# Altium PCB PCB1.PcbDoc
Units mm, origin at the board's own origin, x right, y up, seen from the top; angles counter-clockwise.
Board outline 119 x 80.39 mm, 2 copper layers (Top Layer, Bottom Layer); 30 components, 53 nets, 178 pads, 36 vias.
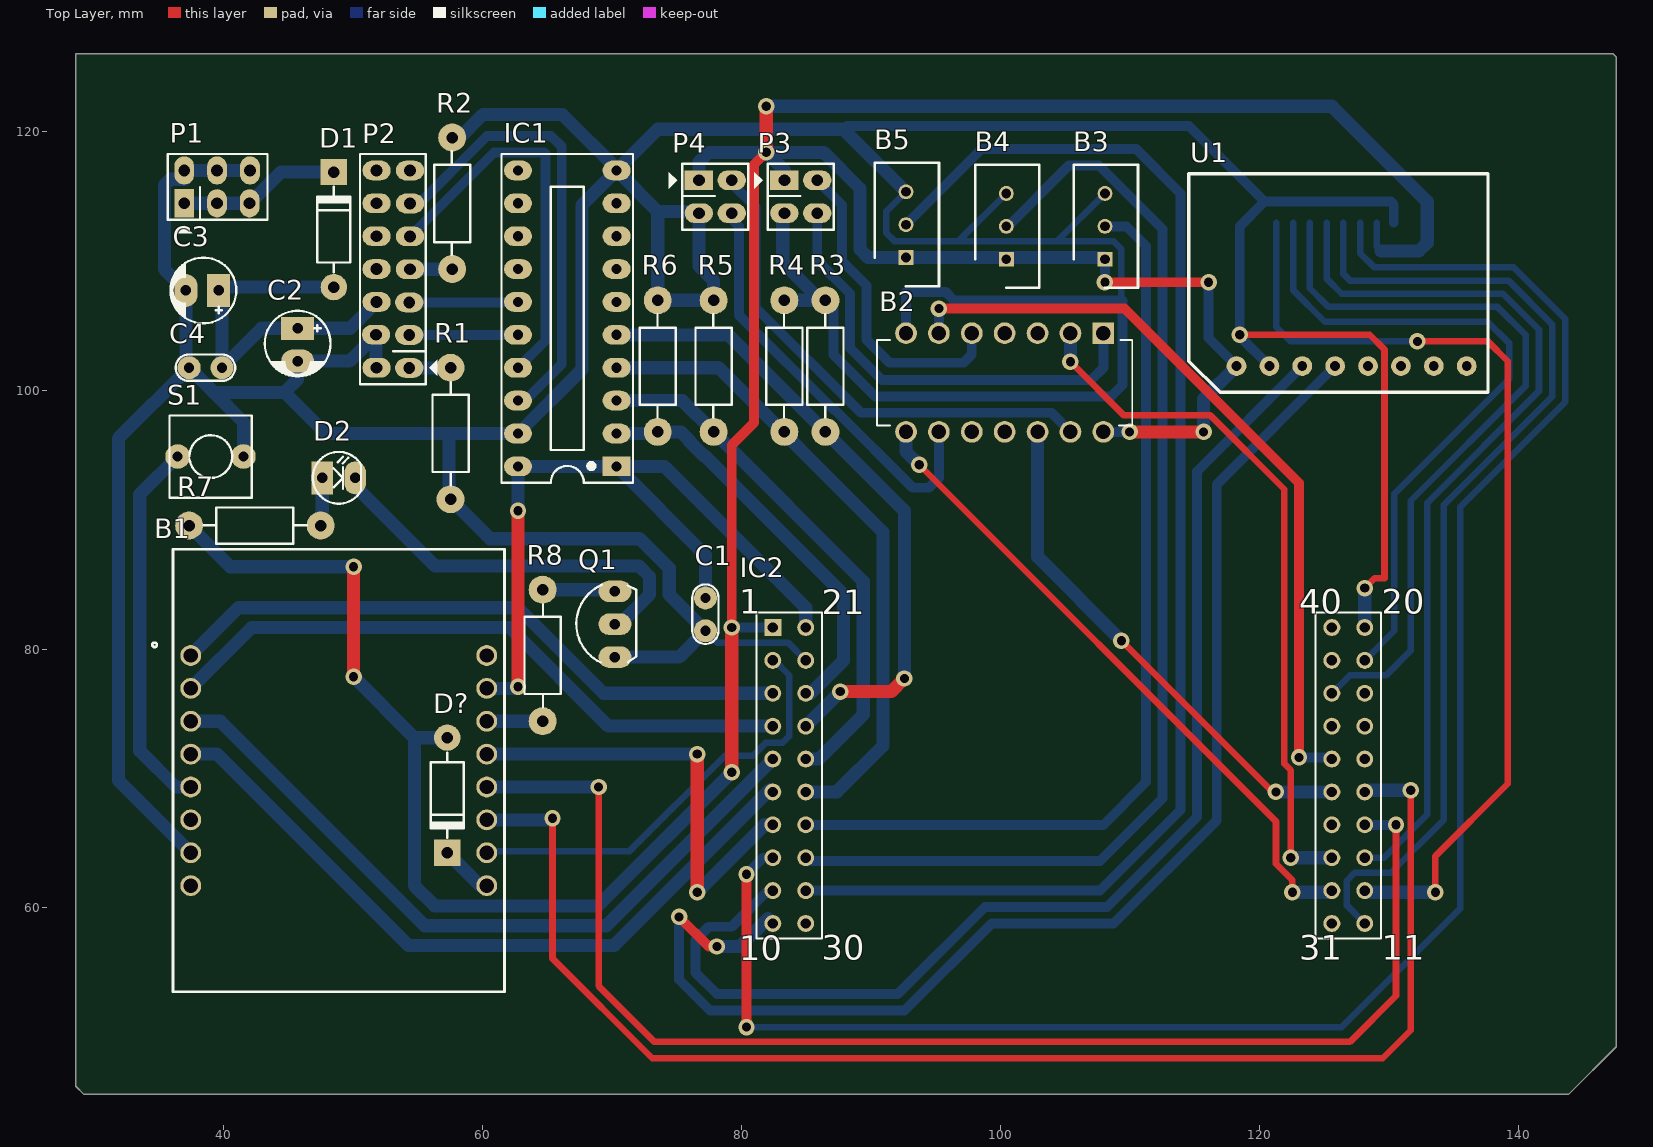
[diagram p0: Top Layer view]
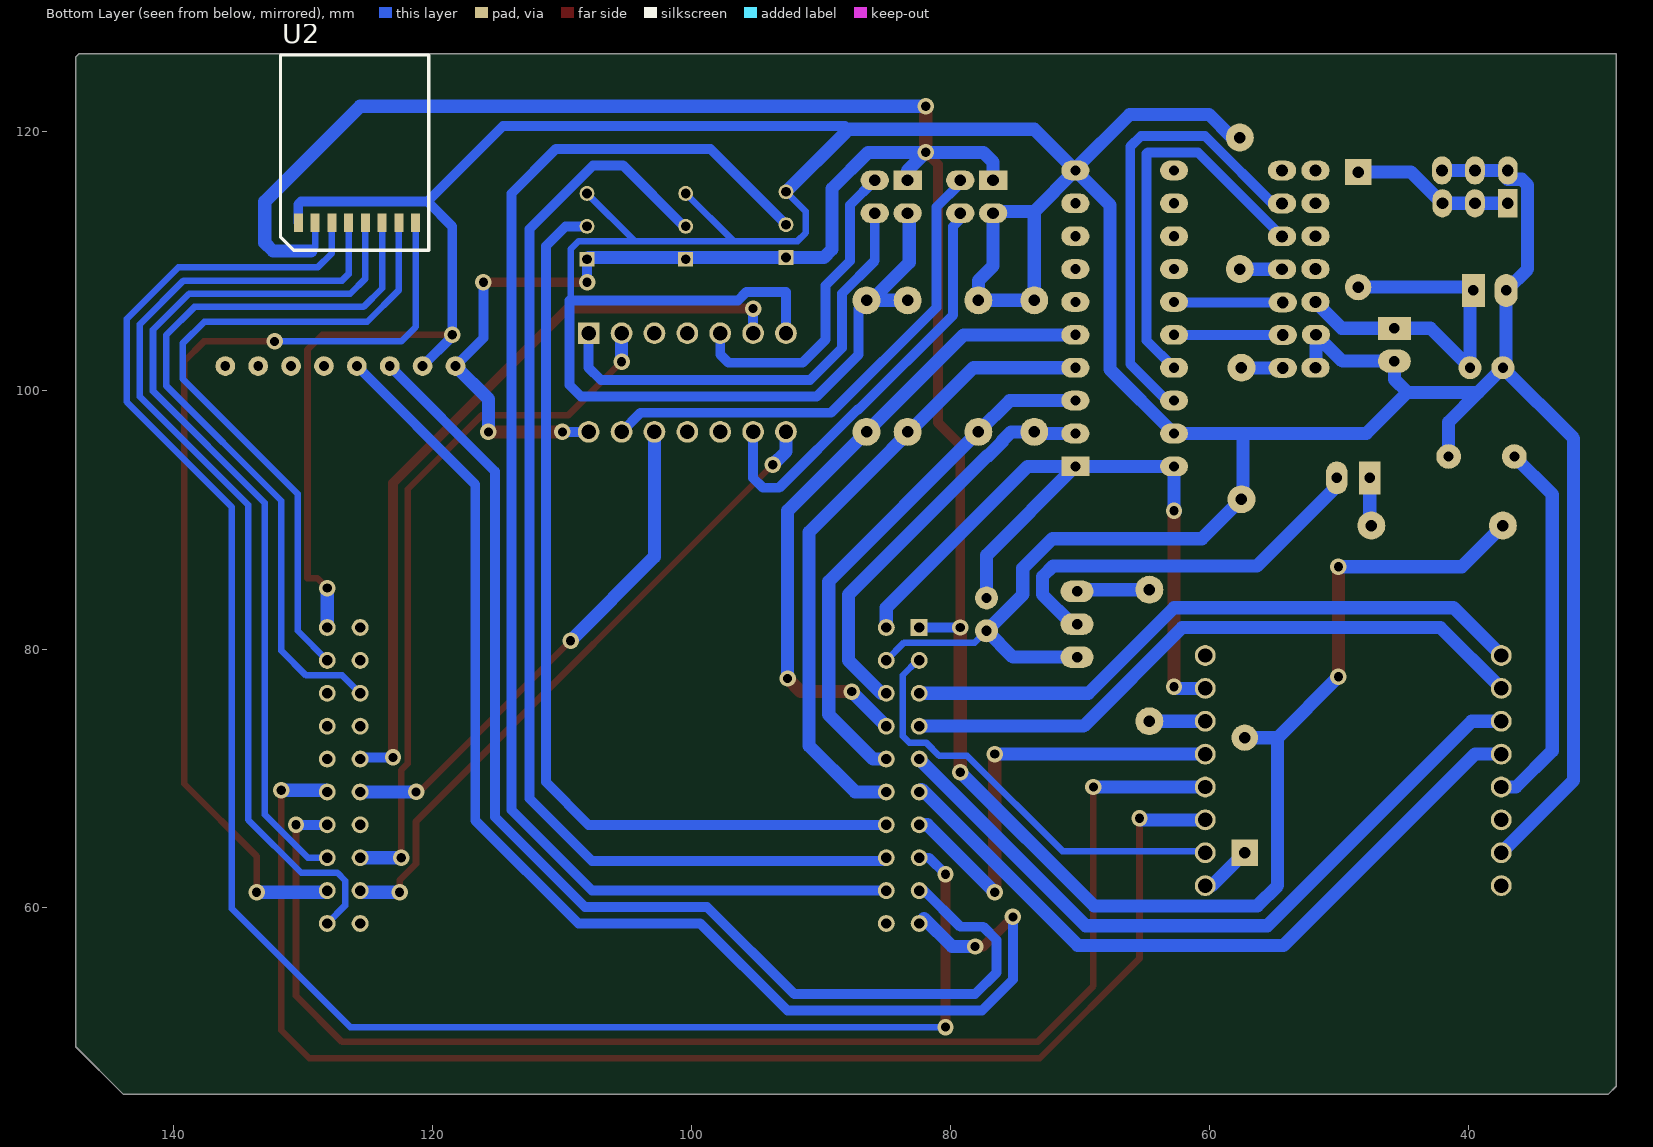
[diagram p1: Bottom Layer view, seen from below]
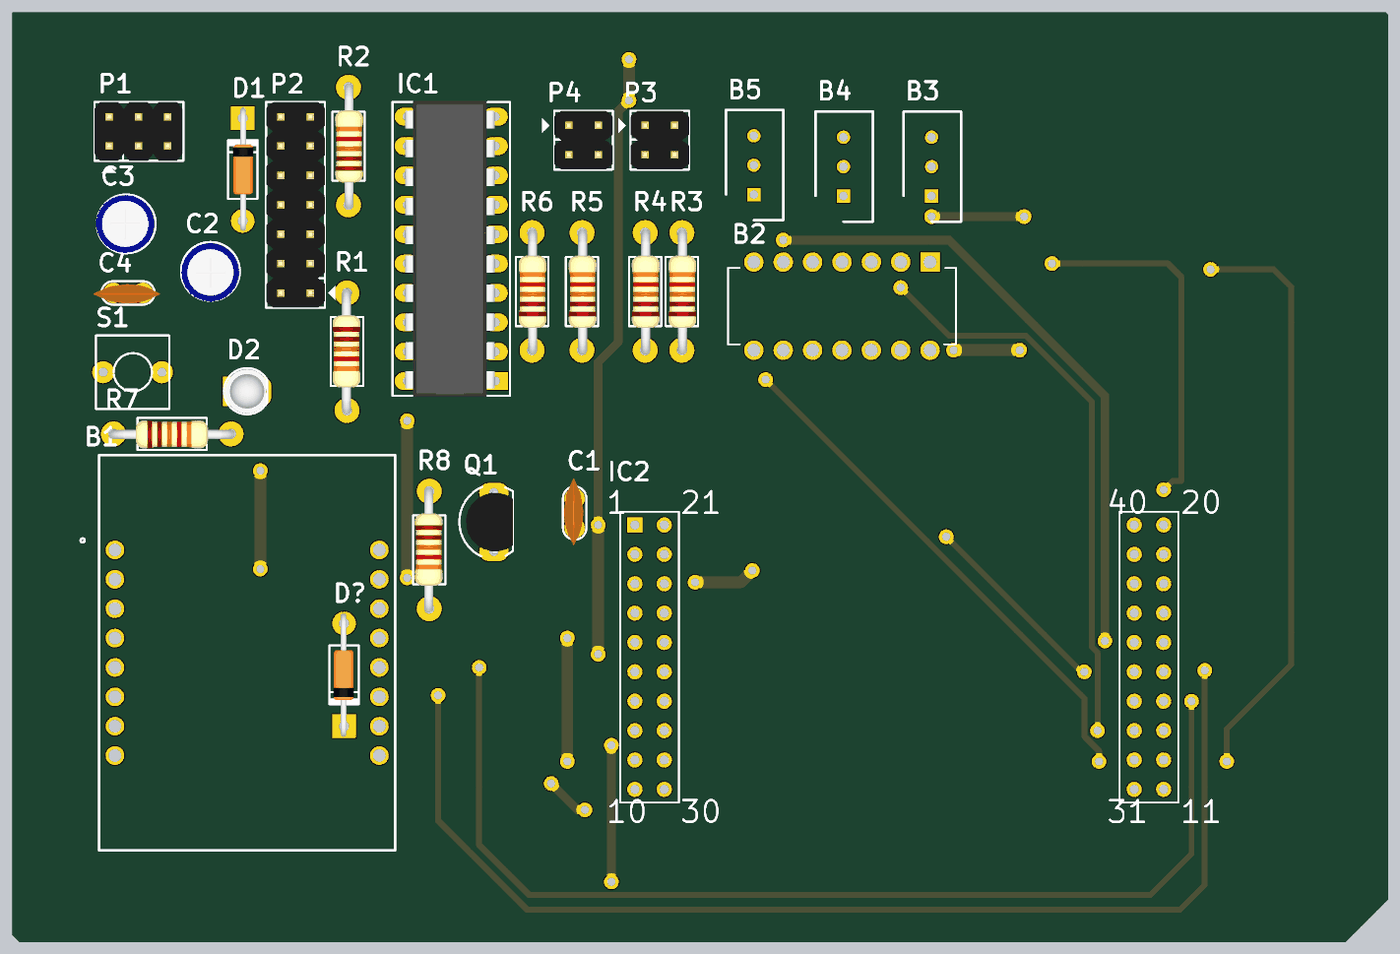
[diagram p2: 3D render of the assembled board from above, using the file's embedded part models]

## Layer stack, top to bottom
Top Solder: solder mask 0.0102, Solder Resist, Dk 3.5
Top Layer: signal copper 0.0356
Dielectric 1: dielectric 0.32, FR-4, Dk 4.8
Bottom Layer: signal copper 0.0356
Bottom Solder: solder mask 0.0102, Solder Resist, Dk 3.5

## Board outline
28.575,46.228 28.575,125.984 147.32,125.984 147.574,125.73 147.574,49.276 143.891,45.593 29.21,45.593

## Design rules (kind name [scope] priority, off if disabled: settings)
Clearance [All] p1: gap=0.254 ignorepadtopadclearanceinfootprint=FALSE except(0: Arc-Hole Track-Hole SMDPad-Hole THPad-Hole Via-Hole Fill-Hole Poly-Hole Region-Hole Text-Hole; 0.508: Track-Track Via-Via; 0.762: Arc-Poly Track-Poly SMDPad-Poly THPad-Poly Via-Poly Fill-Poly Poly-Poly)
PolygonConnect [All] p1: connectstyle=Relief reliefconductorwidth=0.254 reliefentries=4 polygonreliefangle="90 Angle" airgapwidth=0.254
RoutingVias [All] p1: holewidth=0.711 width=1.27 viastyle="Through Hole" minholewidth=0.711 minwidth=1.27 maxholewidth=0.711 maxwidth=1.27
SolderMaskExpansion [All] p1: expansion=0.102
Width [All] p1: maxlimit=1.016 minlimit=0.508 preferedwidth=0.762
30 further rules are at their usual default settings.

## Components (designator, comment, footprint, x,y, rotation, side; value= is the part's Value field where it differs from the comment)
B1 "D1_Mini" D1-MINI 48.895,70.612 r0 top
B2 "SN74HC14N" DIP254P762X508-14 92.71,96.774 r270 top
B3 "3296W-1-103LF" SHDR3W54P0X254_1X3_953X483X1155P 108.077,110.109 r270 top
B4 "3296W-1-103LF" SHDR3W54P0X254_1X3_953X483X1155P 100.457,110.109 r270 top
B5 "3296W-1-103LF" SHDR3W54P0X254_1X3_953X483X1155P 92.71,110.236 r270 top
C1 "Cap Non-Pol" CN1 77.216,81.407 r90 top value=100nF
C2 "Cap Pol" CP1/2 45.72,104.775 r270 top value=470uF
C3 "Cap Pol" CP1/2 39.624,107.696 r180 top value=10uF
C4 "Cap Non-Pol" CN1 39.878,101.727 r180 top value=104pF
D1 "Diode" D1A 48.514,107.95 r270 top
D2 "LED" LED-3mm 47.625,93.218 r0 top
D? "Diode" D1A 57.277,73.152 r90 top
IC1 "74245" DIP20 70.358,94.107 r90 top
IC2 "EK-TM4C123GXL" TM4C123LAUNCHPAD 105.283,68.961 r0 top
P1 "Header 3X2" JP3x2 39.497,115.697 r0 top
P2 "Header 7X2" JP7X2 54.356,101.727 r90 top
P3 "Header 2X2" JP2X2 83.312,116.205 r270 top
P4 "Header 2X2" JP2X2 76.708,116.205 r270 top
Q1 "C1815" QTO-92 70.231,81.915 r90 top
R1 "RESISTOR" "RES 1/2W" 57.531,91.567 r90 top value=1K
R2 "RESISTOR" "RES 1/2W" 57.658,119.507 r270 top value=1K
R3 "RESISTOR" "RES 1/2W" 86.487,106.934 r270 top value=10K
R4 "RESISTOR" "RES 1/2W" 83.312,106.934 r270 top value=10K
R5 "RESISTOR" "RES 1/2W" 77.851,106.934 r270 top value=10K
R6 "RESISTOR" "RES 1/2W" 73.533,106.934 r270 top value=10K
R7 "RESISTOR" "RES 1/2W" 47.498,89.535 r180 top value=100
R8 "RESISTOR" "RES 1/2W" 64.643,74.422 r90 top value=10k
S1 "Tact SW - 2Pin" SW2 41.529,94.869 r180 top
U1 "GY-521" GT-521 116.078,136.398 r90 top
U2 "CC2500" ESP-07S 121.412,120.777 r90 bottom

## Footprints (in the part's own frame and the unit in brackets; to place one, negate y for a bottom-side part, rotate by r counter-clockwise, add the part's x,y. Pads: shape width x height; smd on the part's side, far side on the other; paste and mask are expansions set on the pad)
CN1 [mil]
  round 70 hole 31: 1(0,0) 2(100,0)
  silkscreen extent -40,-40 141,40, body extent -60,-30 170,37, height 265
CP1/2 [mil] "Tu hoa < 22uF/16>50V"
  rect 70x100 hole 32: 1(0,0)
  oval 70x100 hole 32: 2(100,0)
  silkscreen extent -53,-100 146,100, body extent -49,-99 149,99, height 287
D1-MINI [mm]
  round 1.61 hole 1.11: 1(-11.43,8.89) 2(-11.43,6.35) 3(-11.43,3.81) 4(-11.43,1.27) 5(-11.43,-1.27) 6(-11.43,-3.81) 7(-11.43,-6.35) 8(-11.43,-8.89) 9(11.43,-8.89) 10(11.43,-6.35) 11(11.43,-3.81) 12(11.43,-1.27) 13(11.43,1.27) 14(11.43,3.81) 15(11.43,6.35) 16(11.43,8.89)
  silkscreen extent -14.4,-17.1 12.8,17.1
D1A [mil] "Diode 1N4007, W 100mil, L 350mil"
  round 80 hole 35: 1(0,0)
  rect 80x80 hole 35: 2(-350,0)
  silkscreen extent -305,-50 -45,50, body extent -386,-33 34,36, height 84
DIP20 [mil] "DIP 20, 20 PIN, W 300mil, Pin to pin 100mil"
  rect 60x85 hole 31: 1(0,0)
  oval 60x85 hole 31: 2(100,0) 3(200,0) 4(300,0) 5(400,0) 6(500,0) 7(600,0) 8(700,0) 9(800,0) 10(900,0) 11(900,300) 12(800,300) 13(700,300) 14(600,300) 15(500,300) 16(400,300) 17(300,300) 18(200,300) 19(100,300) 20(0,300)
  silkscreen extent -50,-50 950,350, body extent -54,2 954,308, height 177
DIP254P762X508-14 [mil]
  rect 66x66 / inner round 66 / far side rect 66x66 hole 44: 1(-300,600)
  round 66 hole 44: 2(-300,500) 3(-300,400) 4(-300,300) 5(-300,200) 6(-300,100) 7(-300,0) 8(0,0) 9(0,100) 10(0,200) 11(0,300) 12(0,400) 13(0,500) 14(0,600)
  silkscreen extent -280,-88 -20,688
ESP-07S [mm]
  rect 1.4x0.7 smd: 0(-7.849,8.966) 1(-7.849,7.671) 2(-7.849,6.375) 3(-7.849,5.08) 4(-7.849,3.785) 5(-7.849,2.489) 6(-7.849,1.194) 7(-7.849,-0.102)
  silkscreen extent -9.98,-1.12 5.11,10.34
GT-521 [mil]
  round 60 hole 30: 0(-1360,-85) 1(-1360,-185) 2(-1360,-285) 3(-1360,-385) 4(-1360,-485) 5(-1360,-585) 6(-1360,-685) 7(-1360,-785)
  silkscreen extent -1440,-850 -775,60
JP2X2 [mil]
  rect 60x86 hole 36: 1(0,0)
  oval 60x86 hole 36: 2(100,0) 3(100,100) 4(0,100)
  silkscreen extent -50,-91 150,150, body extent -50,-50 150,150, height 335
JP3x2 [mil] "Connector 3x2"
  rect 60x86 hole 36: 1(-100,-50)
  oval 60x86 hole 36: 2(0,-50) 3(99,-50) 4(-100,50) 5(0,50) 6(100,50)
  silkscreen extent -150,-141 153,100, body extent -150,-100 150,100, height 335
JP7X2 [mil]
  oval 60x86 hole 36: 1(-0.5,0.5) 2(99.5,0.5) 3(198.5,0.5) 4(299.5,-1.5) 5(399.5,-1.5) 6(499.5,-1.5) 7(599.5,-1.5) 8(0,100) 9(100.5,101.5) 10(200,100) 11(300,100) 12(400,100) 13(500,100) 14(600,100)
  silkscreen extent -51,-85 650,151, body extent -50,-50 650,150, height 335
LED-3mm [mil] "LED 2 PIN, 3ly Only colour"
  rect 65x100 hole 32: 1(0,0)
  oval 65x100 hole 32: 2(100,0)
  silkscreen extent -29,-78 118,79, body extent -25,-75 113,75, height 217
QTO-92 [mil] "TO-92"
  oval 66x100 hole 32: 1(-100,0) 2(0,0) 3(100,0)
  silkscreen extent -117,-65 120,118, body extent -109,-66 109,95, height 245
"RES 1/2W" [mil] "R 1/2W, 2 pin, 300mil"
  round 85 hole 35: 1(0,0) 2(400,0)
  silkscreen extent 42,-55 356,55, body extent -12,-45 414,49, height 91
SHDR3W54P0X254_1X3_953X483X1155P [mm]
  rect 1.15x1.15 / inner round 1.15 / far side rect 1.15x1.15 hole 0.75: 1(0,0)
  round 1.15 hole 0.75: 2(-2.54,0) 3(-5.08,0)
  silkscreen extent -7.31,-2.41 2.22,2.55
SW2 [mil] "SW button 2pin, 250x 250 mil"
  round 75 hole 31: 1(0,0) 2(200,0)
  silkscreen extent -25,-125 225,125
TM4C123LAUNCHPAD [mm]
  rect 1.308x1.308 hole 0.8: 1(-22.86,12.7)
  round 1.308 hole 0.8: 2(-22.86,10.16) 3(-22.86,7.62) 4(-22.86,5.08) 5(-22.86,2.54) 6(-22.86,0) 7(-22.86,-2.54) 8(-22.86,-5.08) 9(-22.86,-7.62) 10(-22.86,-10.16) 11(22.86,-10.16) 12(22.86,-7.62) 13(22.86,-5.08) 14(22.86,-2.54) 15(22.86,0) 16(22.86,2.54) 17(22.86,5.08) 18(22.86,7.62) 19(22.86,10.16) 20(22.86,12.7) 21(-20.32,12.7) 22(-20.32,10.16) 23(-20.32,7.62) 24(-20.32,5.08) 25(-20.32,2.54) 26(-20.32,0) 27(-20.32,-2.54) 28(-20.32,-5.08) 29(-20.32,-7.62) 30(-20.32,-10.16) 31(20.32,-10.16) 32(20.32,-7.62) 33(20.32,-5.08) 34(20.32,-2.54) 35(20.32,0) 36(20.32,2.54) 37(20.32,5.08) 38(20.32,7.62) 39(20.32,10.16) 40(20.32,12.7)
  silkscreen extent -24.13,-11.3 24.13,13.84

## Part data
B1: "wifi board based on ESP-8266EX.", Manufacturer_Name=Wemos, Manufacturer_Part_Number="D1 Mini", Datasheet Link=https://www.wemos.cc/product/d1-mini.html, Geometry.Height=mm, Supplier_Name=RS
B2: "Hex invertor,SN74HC14N DIP14 2-6V 25pcs", Manufacturer_Name="Texas Instruments", RS Part Number=0442943, Datasheet Link=http://componentsearchengine.com/Datasheets/3/SN74HC14N.pdf, Geometry.Height=mm, Manufacturer_Part_Number=SN74HC14N, Supplier_Name=RS
B3 B4 B5: "Bourns 3296W Series 25-Turn Through Hole Cermet Trimmer Resistor with Pin Terminations, 10000???? ????10% 1/2W ????100ppm/????C", Manufacturer_Name=Bourns, RS Part Number=5219647P, Allied_Number=70153918, Datasheet Link=http://docs-europe.electrocomponents.com/webdocs/069c/0900766b8069ccf4.pdf, Geometry.Height=11.55mm, Manufacturer_Part_Number=3296W-1-103LF, Supplier_Name=RS
C1 C4: "Capacitor"
C2 C3: "Polarized Capacitor (Radial)"
D1 D?: "Default Diode"
IC1: library part 74245_1, "Octal bus tranceiver; 3-state", Copyright by=VanDungEvn@gmail.com
IC2: "EVAL KIT TM4C123GXL LAUNCHPAD", Package=None, Availability=Good, MF="Texas Instruments", MP=EK-TM4C123GXL, Price="20.14 USD"
P1: "Header, 3-Pin, Dual row", LatestRevisionDate=17-Jul-2002, LatestRevisionNote="Re-released for DXP Platform.", Publisher="Altium Limited"
P2: "Header, 7-Pin, Dual row", LatestRevisionDate=17-Jul-2002, LatestRevisionNote="Re-released for DXP Platform.", Publisher="Altium Limited"
P3 P4: "Header, 2-Pin, Dual row", LatestRevisionDate=17-Jul-2002, LatestRevisionNote="Re-released for DXP Platform.", Publisher="Altium Limited"
Q1: "NPN Bipolar Transistor"
R1 R2 R3 R4 R5 R6 R7 R8: "Resistor"
S1: "Switch button 2 pin"

## Via types
v1: diameter 1.27, hole 0.711, Top Layer to Bottom Layer, 36 vias

## Nets (pads, with @x,y where several pads share a name; then routed paths per layer and width w, separated by ;. In a path a pad name is that pad's centre, name@x,y a point inside that pad or via, vN(x,y) a via of type N, cw(c..) or ccw(c..) an arc to the next point about the centre after c; other vN are vias at no path point)
3V3: B2.14 B3.1 B4.1 B5.1 D?.1 IC2.1 P3.1 P4.1 R7.2 U1.0 U2.1 | length 264.7
  Top Layer w0.762: v1(79.248,81.661) 79.248,95.746 80.975,97.474 80.975,117.424 v1(81.915,118.364) ; v1(108.077,108.331) v1(116.078,108.331)
  Top Layer w1.016: v1(50.038,77.851) v1(50.038,86.36) ; v1(79.248,70.485) v1(79.248,81.661) ; v1(81.915,118.364) v1(81.915,121.92) ; v1(109.982,96.774) v1(115.697,96.774)
  Bottom Layer w0.508: U2.1 129.083,111.074 129.413,110.744
  Bottom Layer w0.762: v1(79.248,81.661) IC2.1 ; B2.14 v1(109.982,96.774) ; v1(108.077,108.331) B3.1 ; v1(116.078,108.331) 116.078,104.013 U1.0
  Bottom Layer w1.016: R7.2 40.513,86.36 v1(50.038,86.36) ; v1(50.038,77.851) 54.737,73.152 ; D?.1 54.737,73.152 ; P4.1 76.708,117.602 77.47,118.364 v1(81.915,118.364) ; v1(79.248,70.485) 68.918,60.155 56.304,60.155 54.737,61.722 54.737,73.152 ; v1(81.915,121.92) 125.603,121.92 132.969,114.554 132.969,111.379 132.334,110.744 129.413,110.744 ; P3.1 83.312,116.967 v1(81.915,118.364) ; B3.1 107.95,110.236 B5.1 89.789,110.236 89.154,110.871 89.154,115.57 86.36,118.364 v1(81.915,118.364) ; v1(115.697,96.774) 115.697,99.314 U1.0
5V: B1.15 C1.2 IC1.1 IC1.20 IC2.21 | length 60.9
  Top Layer w1.016: v1(62.738,77.089) v1(62.738,90.678)
  Bottom Layer w1.016: B1.15 62.611,76.962 v1(62.738,77.089) ; v1(62.738,90.678) 62.611,90.678 62.738,90.805 IC1.20 IC1.1 ; C1.2 77.216,87.249 IC1.1 ; IC2.21 84.963,83.189 74.045,94.107 IC1.1
5VS: C2.1 C3.1 C4.1 D1.1 P2.10 | length 29.1
  Bottom Layer w1.016: D1.1 39.878,107.95 C3.1 39.878,107.442 C4.1 42.926,104.775 C2.1 49.784,104.775 P2.10
ADC0: B3.2 IC2.27 | length 72.9
  Bottom Layer w0.762: IC2.27 107.95,66.421 111.252,69.723 111.252,111.125 109.728,112.649 B3.2
ADC1: B4.2 IC2.28 | length 89.7
  Bottom Layer w0.762: IC2.28 85.217,63.627 107.696,63.627 112.522,68.453 112.522,112.455 107.629,117.348 105.283,117.348 100.584,112.649 B4.2
ADC2: B5.2 IC2.29 | length 104.2
  Bottom Layer w0.762: IC2.29 107.696,61.341 113.919,67.564 113.919,115.189 110.49,118.618 98.552,118.618 B5.2
CCCSN: IC2.12 U2.7 | length 76
  Top Layer w0.508: v1(132.207,103.759) 137.668,103.759 139.192,102.235 139.192,69.596 133.604,64.008 v1(133.604,61.214)
  Bottom Layer w0.508: U2.7 121.31,104.877 122.428,103.759 v1(132.207,103.759)
  Bottom Layer w1.016: IC2.12 128.27,61.214 128.397,61.341 128.524,61.214 v1(133.604,61.214)
CCGDO0: IC2.19 U2.6 | length 52.7
  Bottom Layer w0.508: U2.6 122.606,107.732 125.055,105.283 137.633,105.283 139.319,103.597 139.319,100.873 130.429,91.983 130.429,81.407 IC2.19
CCGDO2: IC2.38 U2.5 | length 58.7
  Bottom Layer w0.508: U2.5 123.901,107.874 125.349,106.426 138.395,106.426 140.589,104.232 140.589,100.347 131.699,91.457 131.699,79.883 129.775,77.959 126.981,77.959 IC2.38
CCSCLK: IC2.11 U2.3 | length 76.8
  Bottom Layer w0.508: U2.3 126.492,108.966 127,108.458 139.237,108.458 142.621,105.074 142.621,99.505 134.239,91.123 134.239,66.802 130.156,62.719 127.362,62.719 126.746,62.103 126.765,62.084 126.765,60.179 IC2.11
CCSI: IC2.8 U2.2 | length 142.5
  Top Layer w0.762: v1(80.391,50.8) v1(80.391,62.611)
  Bottom Layer w0.508: v1(80.391,50.8) 126.365,50.8 135.509,59.944 135.509,90.956 143.637,99.084 143.637,105.495 139.658,109.474 128.887,109.474 127.787,110.574 U2.2
  Bottom Layer w0.762: v1(80.391,62.611) 81.661,63.881 IC2.8
CCSO: IC2.13 U2.4 | length 69.6
  Bottom Layer w0.508: U2.4 125.197,108.61 126.365,107.442 138.816,107.442 141.605,104.653 141.605,99.926 132.969,91.29 132.969,67.218 129.632,63.881 IC2.13
ECD0: B2.1 P3.3 | length 35.1
  Bottom Layer w0.762: P3.3 85.852,109.994 88.392,107.454 88.392,103.251 90.856,100.787 107.01,100.787 107.95,101.727 B2.1
ECD0IN: B2.2 IC2.33 | length 54.6
  Top Layer w0.508: v1(105.41,102.184) 109.55,98.044 116.223,98.044 121.92,92.347 121.92,71.155 122.428,70.647 v1(122.428,63.881)
  Bottom Layer w1.016: v1(105.41,102.184) B2.2 ; v1(122.428,63.881) IC2.33
ECD1: B2.5 P3.4 | length 24.7
  Bottom Layer w0.762: P3.4 87.757,114.3 87.757,109.982 89.662,108.077 89.662,103.886 91.44,102.108 97.155,102.108 97.79,102.743 B2.5
ECD1IN: B2.6 IC2.36 | length 59.1
  Top Layer w0.762: v1(95.25,106.299) 109.584,106.299 123.063,92.82 v1(123.063,71.628)
  Bottom Layer w0.762: B2.6 v1(95.25,106.299) ; v1(123.063,71.628) 125.476,71.628 IC2.36
ECD2: B2.9 P4.3 | length 32.9
  Bottom Layer w0.762: P4.3 79.248,113.221 79.819,112.649 79.819,105.776 87.107,98.489 87.197,98.489 93.23,92.456 94.488,92.456 95.25,93.218 B2.9
ECD2IN: B2.8 IC2.32 | length 51
  Top Layer w0.508: v1(93.726,94.234) 121.285,66.675 121.285,63.408 122.555,62.138 v1(122.555,61.214)
  Bottom Layer w1.016: B2.8 92.71,95.25 v1(93.726,94.234) ; v1(122.555,61.214) 125.476,61.214 125.495,61.233 IC2.32@125.495,61.341
ECD3: B2.13 P4.4 | length 38.9
  Bottom Layer w0.762: P4.4 79.248,115.971 81.09,114.129 81.09,106.392 89.235,98.247 103.937,98.247 B2.13
ECD3IN: B2.12 IC2.35 | length 39.9
  Top Layer w0.508: v1(109.347,80.645) 121.031,68.961 v1(121.285,68.961)
  Bottom Layer w1.016: B2.12 102.87,87.122 v1(109.347,80.645) ; v1(121.285,68.961) IC2.35
ESPLED: B1.14 R8.1 | length 4.3
  Bottom Layer w1.016: B1.14 R8.1
ESPMISO: B1.12 IC2.14 | length 104.5
  Top Layer w0.508: v1(68.961,69.342) 68.961,53.975 73.279,49.657 127,49.657 130.556,53.213 v1(130.556,66.421)
  Bottom Layer w0.762: IC2.14 v1(130.556,66.421)
  Bottom Layer w1.016: B1.12 v1(68.961,69.342)
ESPMOSI: B1.11 IC2.15 | length 108.5
  Top Layer w0.508: v1(65.405,66.929) 65.405,56.094 73.112,48.387 129.54,48.387 131.699,50.546 v1(131.699,69.088)
  Bottom Layer w1.016: B1.11 65.278,66.802 v1(65.405,66.929) ; IC2.15 128.27,69.088 v1(131.699,69.088)
ESPRX: B1.2 IC2.4 | length 50.1
  Bottom Layer w1.016: B1.2 42.164,81.661 62.107,81.661 69.727,74.041 IC2.4
ESPSCK: B1.13 IC2.7 | length 34.9
  Top Layer w1.016: v1(76.581,61.214) v1(76.581,71.882)
  Bottom Layer w1.016: B1.13 v1(76.581,71.882) ; v1(76.581,61.214) 81.788,66.421 IC2.7
ESPSCL: B1.3 IC2.5 | length 56.8
  Bottom Layer w1.016: B1.3 39.751,74.422 55.542,58.631 69.553,58.631 IC2.5
ESPSDA: B1.4 IC2.6 | length 56.1
  Bottom Layer w1.016: B1.4 39.497,71.882 54.272,57.107 70.184,57.107 82.231,69.153 IC2.6
ESPSS: B1.10 IC2.2 | length 33.5
  Bottom Layer w0.508: B1.10@60.452,64.389 71.356,64.389 78.722,71.755 80.881,71.755 81.897,72.771 83.185,72.771 83.693,73.279 83.693,77.978 82.55,79.121 IC2.2
  Bottom Layer w1.016: B1.10 B1.10@60.452,64.389
ESPTX: B1.1 IC2.3 | length 49.2
  Bottom Layer w1.016: B1.1 41.148,83.185 62.738,83.185 69.342,76.581 IC2.3
FAULT: P2.7
GND: B1.7 B2.7 B3.3 B4.3 B5.3 C1.1 C2.2 C3.2 C4.2 IC1.10 IC1.19 IC2.20 IC2.22 P1.4 P1.5 P1.6 P2.8 P2.9 P3.2 P4.2 Q1.1 R1.1 R2.1 R3.1 R4.1 R5.1 R6.1 S1.1 U1.1 U2.0 | length 445.6
  Top Layer w0.508: v1(118.491,104.267) 128.524,104.267 129.667,103.124 129.667,85.471 128.905,85.471 v1(128.143,84.709)
  Bottom Layer w0.508: C1.1 78.124,80.499 83.585,80.499 IC2.22 ; B5.3 91.186,113.792 91.186,112.141 91.821,111.506 96.774,111.506 ; B4.3 96.774,111.506 ; B3.3 104.394,111.506 ; 109.347,106.68 109.347,106.934 109.347,110.871 108.712,111.506 104.394,111.506 ; 96.774,111.506 104.394,111.506
  Bottom Layer w0.762: R3.1 87.122,106.299 87.122,102.725 90.33,99.517 108.534,99.517 109.423,100.406 109.423,106.934 109.347,106.934 96.411,106.934 95.776,107.569 92.71,107.569 B2.7 ; 87.884,120.142 88.138,120.396 114.554,120.396 120.396,114.554 ; U1.1 118.491,104.14 v1(118.491,104.267) 118.491,112.649 120.396,114.554 ; U2.0 130.378,114.351 130.175,114.554 120.396,114.554
  Bottom Layer w1.016: B1.7 31.877,69.85 31.877,96.266 C4.2 ; S1.1 41.529,97.536 39.243,99.822 ; P1.6 P1.5 P1.4 36.957,116.281 35.879,116.281 35.433,115.835 35.433,109.347 C3.2 37.084,101.981 C4.2 ; P2.8 51.778,101.765 P2.9 49.733,102.235 C2.2 45.72,100.838 44.704,99.822 ; R2.1 58.255,119.507 60.033,121.285 66.167,121.285 70.358,117.094 IC1.10 ; Q1.1 75.184,79.375 C1.1 74.422,84.201 74.422,86.233 72.136,88.519 60.579,88.519 R1.1 57.404,91.694 57.404,96.647 ; R4.1 R3.1@86.106,106.934 ; P3.2 83.185,113.538 83.185,109.855 R3.1@86.106,106.934 ; R3.1 R3.1@86.106,106.934 ; 87.884,120.142 73.533,120.142 IC1.10 ; 88.138,119.888 B5.3 ; IC2.20 v1(128.143,84.709) ; C4.2 39.243,99.822 ; 39.243,99.822 44.704,99.822 ; 44.704,99.822 47.879,96.647 57.404,96.647 ; 57.404,96.647 IC1.19 67.691,101.6 67.691,114.3 IC1.10 ; IC1.10 73.533,113.792 ; 73.533,113.792 R6.1 R5.1 77.851,108.458 76.708,109.601 P4.2 76.581,113.792 73.533,113.792
GY521SCL: IC2.9 U1.2 | length 93.4
  Bottom Layer w0.762: IC2.9 82.042,61.341 79.248,58.547 77.47,58.547 76.454,57.531 76.454,54.991 78.105,53.34 92.075,53.34 98.806,60.071 108.222,60.071 115.189,67.038 115.189,93.726 U1.2
GY521SDA: IC2.10 U1.3 | length 101.6
  Top Layer w0.762: v1(75.184,59.309) 77.47,57.023 v1(78.105,57.023)
  Bottom Layer w0.762: v1(75.184,59.309) 75.184,54.465 77.579,52.07 92.601,52.07 99.332,58.801 108.748,58.801 116.713,66.766 116.713,92.71 U1.3
  Bottom Layer w1.016: v1(78.105,57.023) 79.883,57.023 82.042,59.182 IC2.10
M1: P2.11
M2: P2.12
M3: P2.13
NetB1_5: B1.5 S1.2 | length 29
  Bottom Layer w1.016: S1.2 33.528,91.948 33.528,72.136 36.322,69.342 B1.5
NetB1_9: B1.9 D?.2 | length 4.1
  Bottom Layer w1.016: D?.2 59.817,61.722 B1.9
NetD1_2: D1.2 P1.1 P1.2 P1.3 | length 12.6
  Bottom Layer w1.016: P1.1 P1.2 P1.3 44.425,116.84 D1.2
NetD2_1: D2.1 R7.1 | length 3.7
  Bottom Layer w1.016: R7.1 47.625,89.662 D2.1
NetD2_2: D2.2 Q1.2 | length 30.5
  Bottom Layer w1.016: D2.2@50.292,92.456 56.325,86.423 72.076,86.423 72.898,85.602 72.898,84.201 70.612,81.915 Q1.2
NetQ1_3: Q1.3 R8.2 | length 5.6
  Bottom Layer w1.016: R8.2 70.104,84.582 Q1.3
OTW: P2.14
PWMA: IC1.18 P2.6 | length 35.9
  Bottom Layer w0.762: P2.6 54.766,114.042 60.358,119.634 65.296,119.634 66.121,118.809 66.121,102.005 63.302,99.187 IC1.18
PWMAOUT: IC1.2 IC2.23 R6.2 | length 31.9
  Bottom Layer w1.016: IC1.2 73.406,96.647 R6.2 75.311,96.774 76.01,96.075 76.01,96.011 77.088,94.932 77.153,94.932 87.884,84.201 87.884,79.121 85.344,76.581 IC2.23
PWMB: P2.4 R2.2 | length 2.7
  Bottom Layer w1.016: P2.4 R2.2@57.137,109.334
PWMC: IC1.15 P2.3 | length 8.4
  Bottom Layer w0.762: P2.3 62.7,106.769 IC1.15
PWMCOUT: IC1.5 IC2.24 R3.2 | length 50
  Top Layer w1.016: v1(87.63,76.708) 91.567,76.708 v1(92.583,77.724)
  Bottom Layer w1.016: IC1.5 78.994,104.267 R3.2 92.583,90.678 v1(92.583,77.724) ; IC2.24 v1(87.63,76.708)
PWMD: P2.1 R1.2 | length 2.9
  Bottom Layer w1.016: P2.1 R1.2@57.264,101.714
RSTAB: IC1.17 P2.5 | length 30.6
  Bottom Layer w0.762: P2.5 60.884,118.364 64.77,118.364 64.851,118.283 64.851,103.84 IC1.17
RSTABOUT: IC1.3 IC2.25 R5.2 | length 41
  Bottom Layer w1.016: IC1.3 75.438,99.187 R5.2 89.408,85.217 89.408,74.93 85.979,71.501 IC2.25
RSTCD: IC1.16 P2.2 | length 8.4
  Bottom Layer w0.762: P2.2 62.725,104.254 IC1.16
RSTCDOUT: IC1.4 IC2.26 R4.2 | length 49.8
  Bottom Layer w1.016: IC1.4 78.232,101.727 90.932,89.027 90.932,72.517 87.376,68.961 IC2.26
pads on no net: B1.6 B1.8 B1.16 B2.3 B2.4 B2.10 B2.11 IC1.6 IC1.7 IC1.8 IC1.9 IC1.11 IC1.12 IC1.13 IC1.14 IC2.16 IC2.17 IC2.18 IC2.30 IC2.31 IC2.34 IC2.37 IC2.39 IC2.40 U1.4 U1.5 U1.6 U1.7

## Text inside footprints (layer, text, board x,y; h text height)
IC2: Top Overlay "1" at 79.838,82.706 h1.88; Top Overlay "10" at 79.816,55.978 h1.88; Top Overlay "11" at 129.469,55.981 h1.88; Top Overlay "20" at 129.467,82.712 h1.88; Top Overlay "21" at 86.206,82.701 h1.88; Top Overlay "30" at 86.206,55.993 h1.88; Top Overlay "31" at 123.099,55.986 h1.88; Top Overlay "40" at 123.098,82.709 h1.88